# Altium PCB lab2_kuchenov_buck.PcbDoc
Units mm, origin at the board's own origin, x right, y up, seen from the top; angles counter-clockwise.
Board outline 41.2 x 41.6 mm, 2 copper layers (Top Layer, Bottom Layer), stack 1.57 mm thick; 27 components, 17 nets, 80 pads, 103 vias.
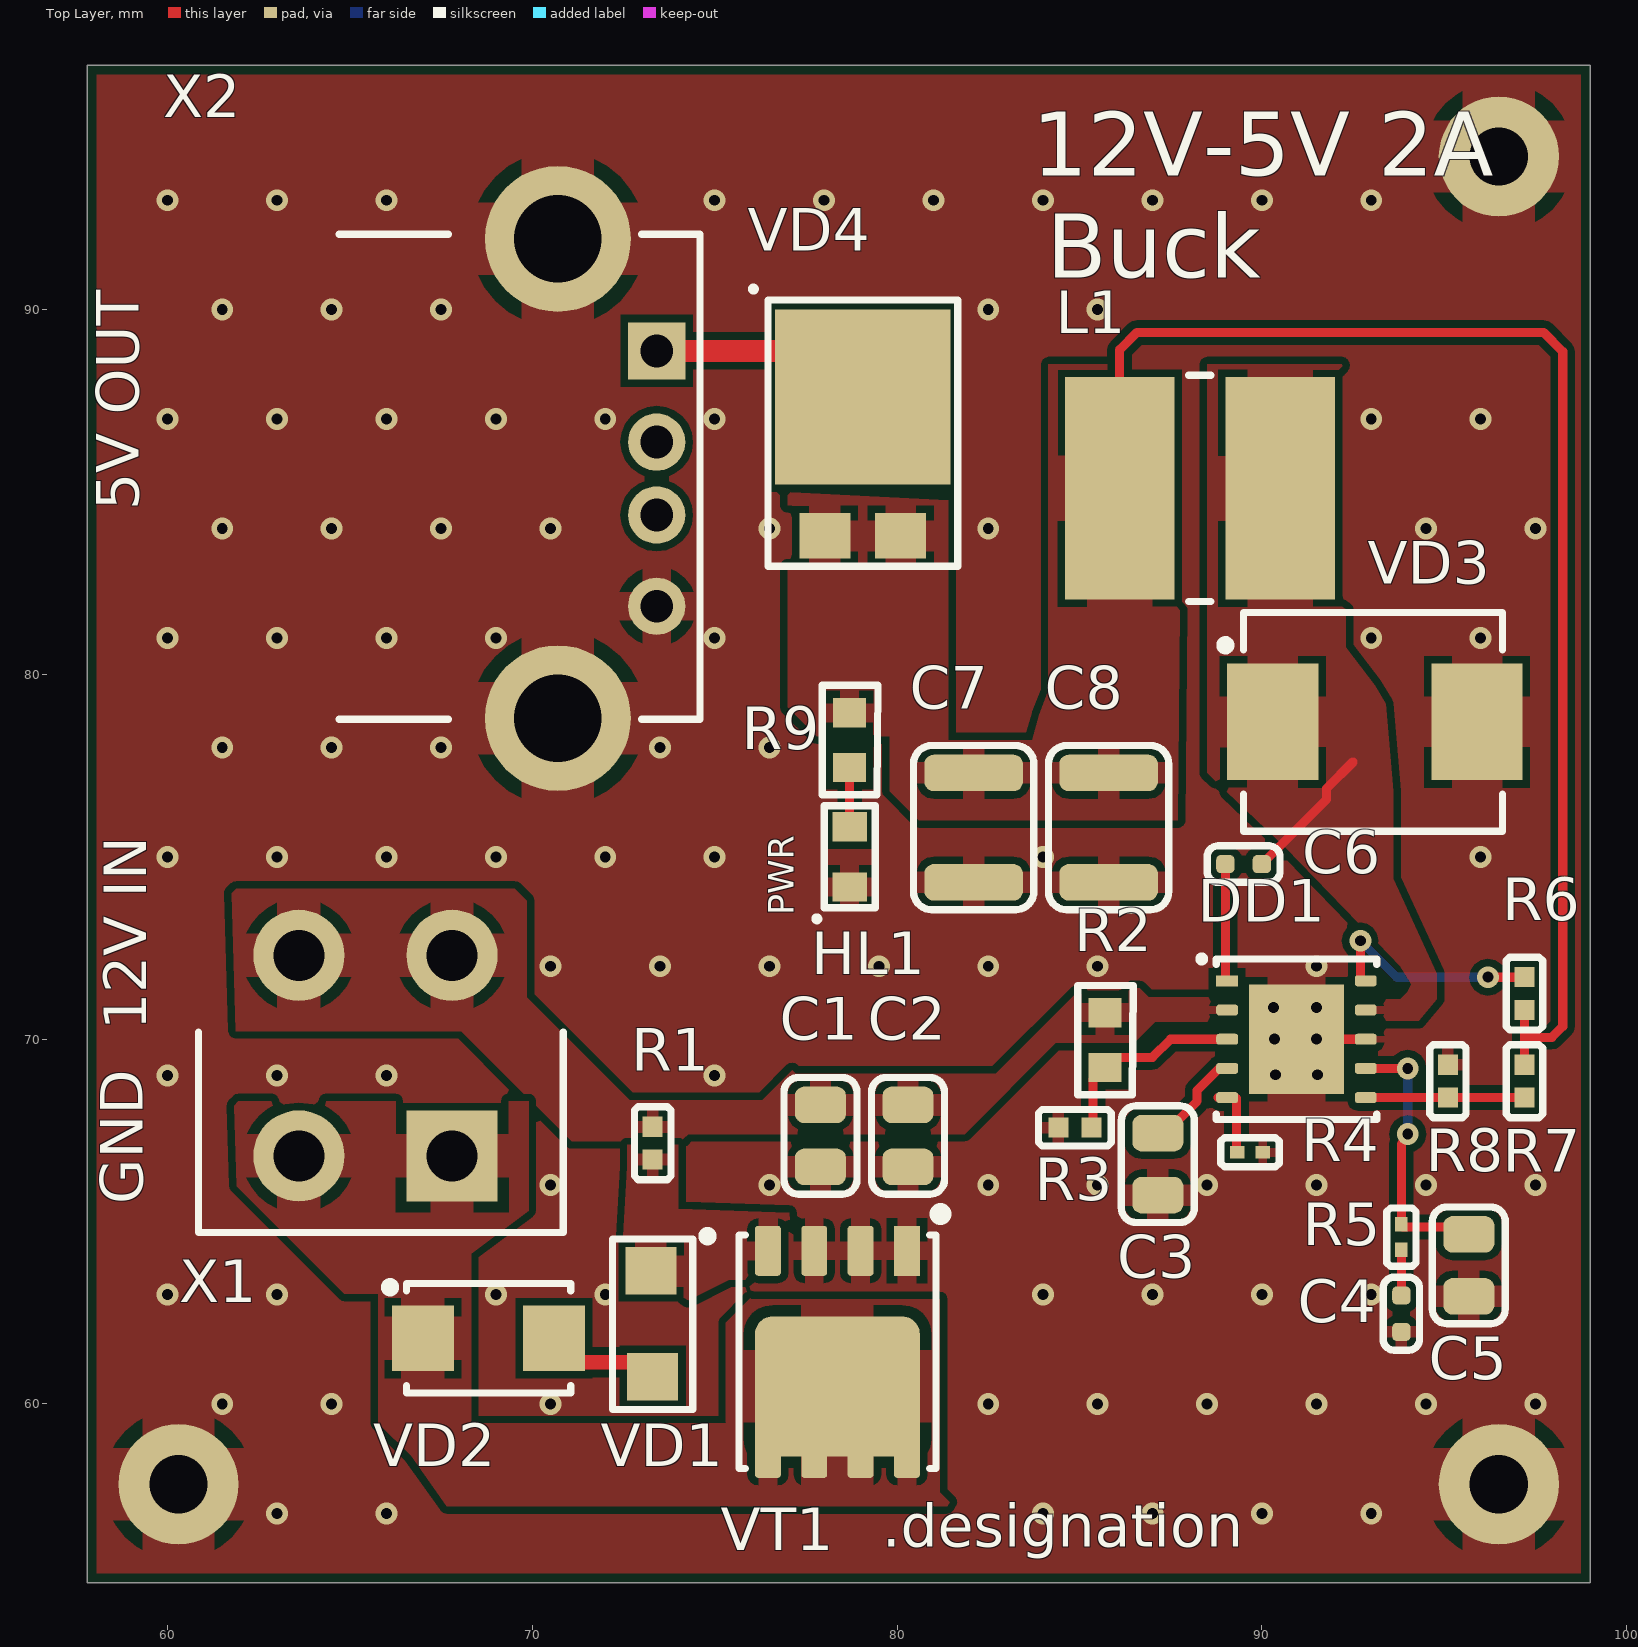
[diagram p0: Top Layer view]
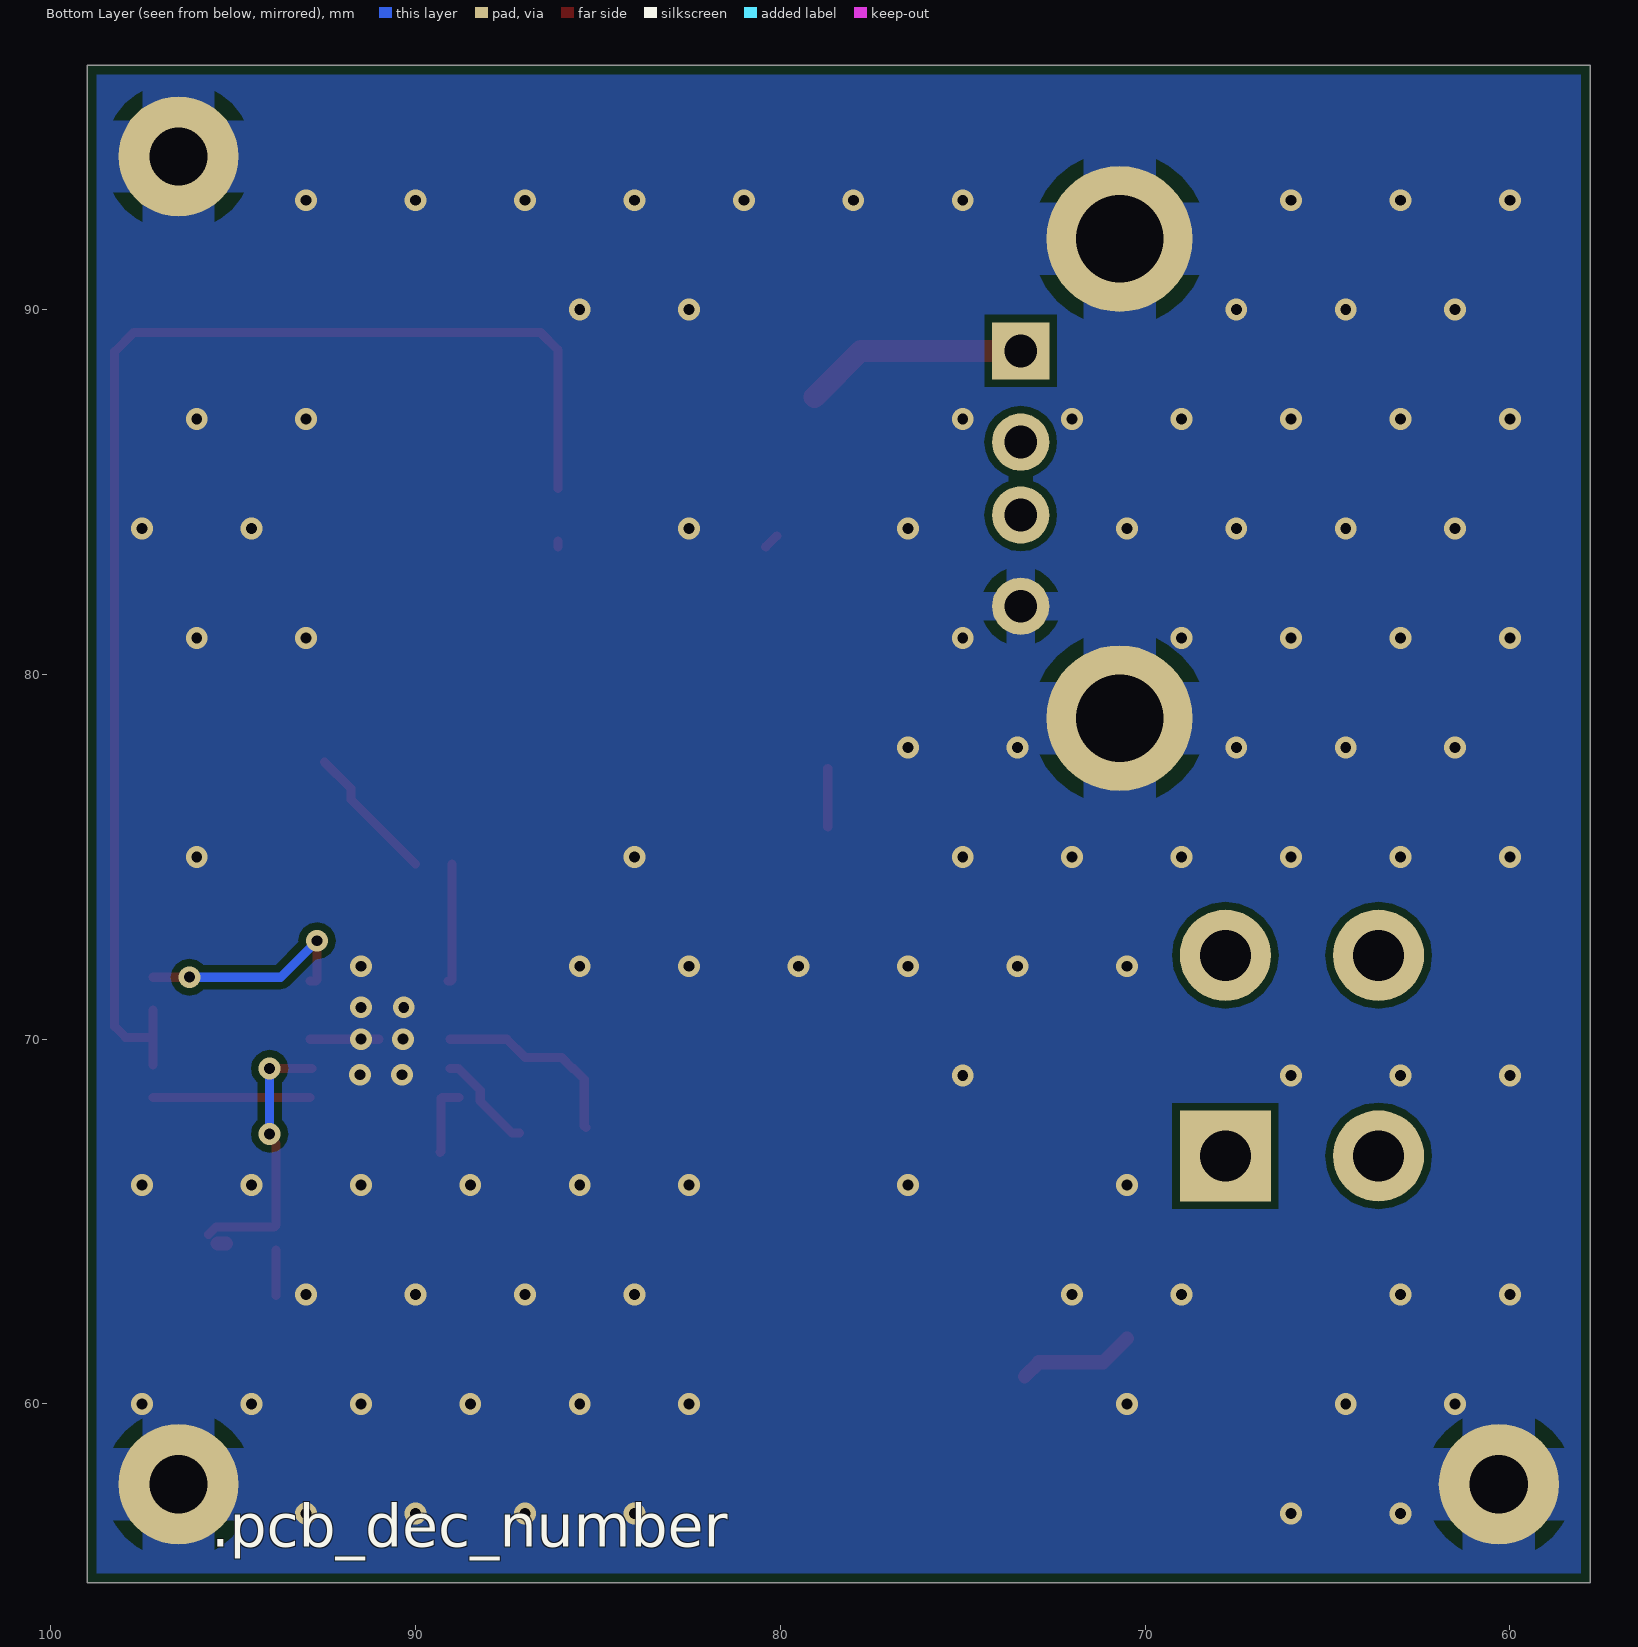
[diagram p1: Bottom Layer view, seen from below]
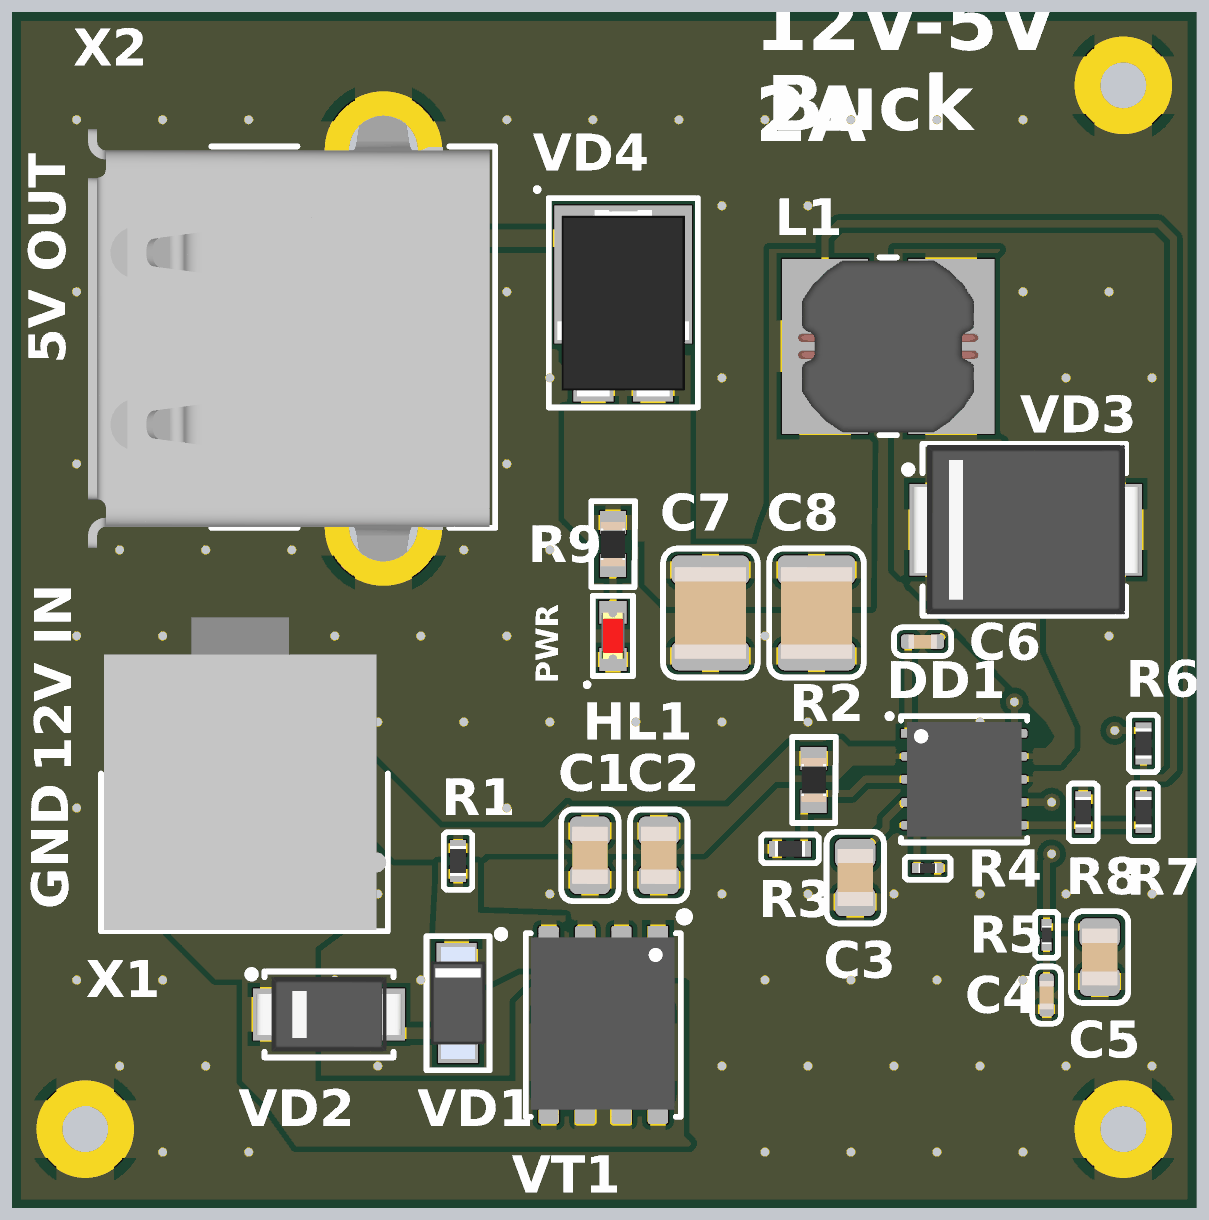
[diagram p2: 3D render of the assembled board from above, using the file's embedded part models]

## Layer stack, top to bottom
Top Solder: solder mask 0.0102, Solder Resist, Dk 3.5
Top Layer: signal copper 0.035
Core 1: core 1.5, FR4, Dk 4.6
Bottom Layer: signal copper 0.035
Bottom Solder: solder mask 0.0102, Solder Resist, Dk 3.5

## Board outline
57.8,55.1 57.8,96.7 99,96.7 99,55.1

## Design rules (kind name [scope] priority, off if disabled: settings)
AcuteAngle min_acute_angle [OnCopper] p1: minimum=3.50000000000000E+0001 checktracksonly=FALSE // Минимальный угол между примитивами топологии
BoardOutlineClearance board_outline_clearance_std [NOT (OnLayer('Bottom Overlay') OR OnLayer('Top Overlay'))] p1: gap=0.25 ignorepadtopadclearanceinfootprint=FALSE except(0: Arc-SplitContinuation Track-SplitContinuation SMDPad-SplitContinuation THPad-SplitContinuation Via-SplitContinuation Fill-SplitContinuation Poly-SplitContinuation Region-SplitContinuation Text-SplitContinuation) // Отступ элементов топологии от края фрезеруемой печатной платы
Clearance clearance_outer_35um_std [OnTopLayer OR OnBottomLayer] p1: gap=0.2 ignorepadtopadclearanceinfootprint=TRUE except(0.25: Arc-Hole Track-Hole SMDPad-Hole THPad-Hole Via-Hole Fill-Hole Poly-Hole Region-Hole Text-Hole) // Зазоры на внешних слоях
Clearance clearance_inner_35um_std [NOT (OnTopLayer Or OnBottomLayer)] p2: gap=0.2 ignorepadtopadclearanceinfootprint=FALSE except(0.25: Arc-Hole Track-Hole SMDPad-Hole THPad-Hole Via-Hole Fill-Hole Poly-Hole Region-Hole Text-Hole) // Зазоры на внутренних слоях
ComponentClearance [All] p1: gap=0 collisioncheckmode=3 verticalgap=0 showdistances=FALSE
DiffPairsRouting diff_pairs_routing [All] p1: maxlimit=0.127 minlimit=0.127 mostfreqgap=0.127 toplayer_minwidth=0.143 toplayer_maxwidth=0.143 toplayer_prefwidth=0.143 bottomlayer_minwidth=0.143 bottomlayer_maxwidth=0.143 bottomlayer_prefwidth=0.143 impedanceprofiledriven=TRUE impedanceprofileid={FD46899E-B5A2-4EF5-A302-5D2DB6A51F35} maxuncoupledlength=12.7 // Правила трассировки дифференциальных пар
HoleSize min_hole_size_std [IsPad] p1: absolutevalues=TRUE maxlimit=5.9 minlimit=0.6 maxpercent=80.000 minpercent=20.000 // Диаметр межслойного переходного отверстия
HoleSize min_hole_size_via_std [IsVia] p2: absolutevalues=TRUE maxlimit=5.9 minlimit=0.3 maxpercent=80.000 minpercent=20.000 // Минимальный диаметр монтажного отверстия
HoleToHoleClearance hole_to_hole_clearance_std [All] p1: gap=0.2 allowstackedmicrovias=FALSE // Минимальное расстояние между краями двух отверстий
MinimumAnnularRing min_via_ar_std [All] p1: minimumring=0.15 // Поясок площадки переходного отверстия (Annular ring VIA)
MinimumAnnularRing min_pad_ar_std [All] p2: minimumring=0.2 // Поясок монтажной контактной площадки (Annular ring PAD)
MinimumSolderMaskSliver min_solder_mask_bridge_std [All] p1: minsoldermaskwidth=0.15 // Мнимальная ширина масочного мостика
PlaneClearance plane_clearance_35um_std [All] p1: clearance=0.2 // Отступ полигона (для слоя plane) от элементов топологии
PlaneConnect [All] p1: planeconnectstyle=Relief reliefexpansion=0.5 reliefentries=4 reliefconductorwidth=0.2 reliefairgap=0.2
PolygonConnect poly_connect_to_pad<=0.3 [(AsMM(PadXSize_AllLayers)<=0.301) or (AsMM(PadYSize_AllLayers)<=0.301)] p1: thpad.connectstyle=Relief thpad.reliefconductorwidth=0.2 thpad.reliefentries=4 thpad.polygonreliefangle="90 Angle" thpad.airgapwidth=0.2 smdpad.connectstyle=Relief smdpad.reliefconductorwidth=0.2 smdpad.reliefentries=4 smdpad.polygonreliefangle="90 Angle" smdpad.airgapwidth=0.2 via.connectstyle=Direct via.reliefconductorwidth=0.254 via.reliefentries=4 via.polygonreliefangle="90 Angle" via.airgapwidth=0.254 // Правила подключения полигонов для падов от 0,3мм и меньше
PolygonConnect poly_connect_to_pad<=0.4 [(AsMM(PadXSize_AllLayers)<=0.401) or (AsMM(PadYSize_AllLayers)<=0.401)] p2: thpad.connectstyle=Relief thpad.reliefconductorwidth=0.26 thpad.reliefentries=4 thpad.polygonreliefangle="90 Angle" thpad.airgapwidth=0.2 smdpad.connectstyle=Relief smdpad.reliefconductorwidth=0.26 smdpad.reliefentries=4 smdpad.polygonreliefangle="90 Angle" smdpad.airgapwidth=0.2 via.connectstyle=Direct via.reliefconductorwidth=0.254 via.reliefentries=4 via.polygonreliefangle="90 Angle" via.airgapwidth=0.254 // Правила подключения полигонов для падов от 0,4 и меньше
PolygonConnect poly_connect_to_pad<=0.6 [(AsMM(PadXSize_AllLayers)<=0.601) or (AsMM(PadYSize_AllLayers)<=0.601)] p3: thpad.connectstyle=Relief thpad.reliefconductorwidth=0.33 thpad.reliefentries=4 thpad.polygonreliefangle="90 Angle" thpad.airgapwidth=0.2 smdpad.connectstyle=Relief smdpad.reliefconductorwidth=0.33 smdpad.reliefentries=4 smdpad.polygonreliefangle="90 Angle" smdpad.airgapwidth=0.2 via.connectstyle=Direct via.reliefconductorwidth=0.254 via.reliefentries=4 via.polygonreliefangle="90 Angle" via.airgapwidth=0.254 // Правила подключения полигонов для падов от 0,6мм и меньше
PolygonConnect poly_connect_to_pad<=0.7 [(AsMM(PadXSize_AllLayers)<=0.701) or (AsMM(PadYSize_AllLayers)<=0.701)] p4: thpad.connectstyle=Relief thpad.reliefconductorwidth=0.46 thpad.reliefentries=4 thpad.polygonreliefangle="90 Angle" thpad.airgapwidth=0.2 smdpad.connectstyle=Relief smdpad.reliefconductorwidth=0.46 smdpad.reliefentries=4 smdpad.polygonreliefangle="90 Angle" smdpad.airgapwidth=0.2 via.connectstyle=Direct via.reliefconductorwidth=0.254 via.reliefentries=4 via.polygonreliefangle="90 Angle" via.airgapwidth=0.254 // Правила подключения полигонов для падов от 0,7мм и меньше
PolygonConnect poly_connect_to_pad<=0.8 [(AsMM(PadXSize_AllLayers)<=0.8)or(AsMM(PadYSize_AllLayers)<=0.8)] p5: thpad.connectstyle=Relief thpad.reliefconductorwidth=0.53 thpad.reliefentries=4 thpad.polygonreliefangle="90 Angle" thpad.airgapwidth=0.3 smdpad.connectstyle=Relief smdpad.reliefconductorwidth=0.53 smdpad.reliefentries=4 smdpad.polygonreliefangle="90 Angle" smdpad.airgapwidth=0.2 via.connectstyle=Direct via.reliefconductorwidth=0.254 via.reliefentries=4 via.polygonreliefangle="90 Angle" via.airgapwidth=0.254 // Правила подключения полигонов для падов от 0,8мм и меньше
PolygonConnect poly_connect_to_pad<=1 [(AsMM(PadXSize_AllLayers)<=1.01)or(AsMM(PadYSize_AllLayers)<=1.01)] p6: thpad.connectstyle=Relief thpad.reliefconductorwidth=0.6 thpad.reliefentries=4 thpad.polygonreliefangle="90 Angle" thpad.airgapwidth=0.3 smdpad.connectstyle=Relief smdpad.reliefconductorwidth=0.6 smdpad.reliefentries=4 smdpad.polygonreliefangle="90 Angle" smdpad.airgapwidth=0.2 via.connectstyle=Direct via.reliefconductorwidth=0.254 via.reliefentries=4 via.polygonreliefangle="90 Angle" via.airgapwidth=0.254 // Правила подключения полигонов для падов от 1мм и меньше
PolygonConnect poly_connect_to_pad<=1.3 [(AsMM(PadXSize_AllLayers)<=1.31)or(AsMM(PadYSize_AllLayers)<=1.31)] p7: thpad.connectstyle=Relief thpad.reliefconductorwidth=0.66 thpad.reliefentries=4 thpad.polygonreliefangle="90 Angle" thpad.airgapwidth=0.3 smdpad.connectstyle=Relief smdpad.reliefconductorwidth=0.86 smdpad.reliefentries=4 smdpad.polygonreliefangle="90 Angle" smdpad.airgapwidth=0.2 via.connectstyle=Direct via.reliefconductorwidth=0.254 via.reliefentries=4 via.polygonreliefangle="90 Angle" via.airgapwidth=0.254 // Правила подключения полигонов для падов от 1,3мм и меньше
PolygonConnect poly_connect_to_pad<=1.6 [(AsMM(PadXSize_AllLayers)<=1.61)or(AsMM(PadYSize_AllLayers)<=1.61)] p8: thpad.connectstyle=Relief thpad.reliefconductorwidth=0.8 thpad.reliefentries=4 thpad.polygonreliefangle="90 Angle" thpad.airgapwidth=0.3 smdpad.connectstyle=Relief smdpad.reliefconductorwidth=1 smdpad.reliefentries=4 smdpad.polygonreliefangle="90 Angle" smdpad.airgapwidth=0.2 via.connectstyle=Direct via.reliefconductorwidth=0.254 via.reliefentries=4 via.polygonreliefangle="90 Angle" via.airgapwidth=0.254 // Правила подключения полигонов для падов от 1,6мм и меньше
PolygonConnect poly_connect_to_pad<=1.8 [(AsMM(PadXSize_AllLayers)<=1.8)or(AsMM(PadYSize_AllLayers)<=1.8)] p9: thpad.connectstyle=Relief thpad.reliefconductorwidth=1 thpad.reliefentries=4 thpad.polygonreliefangle="90 Angle" thpad.airgapwidth=0.3 smdpad.connectstyle=Relief smdpad.reliefconductorwidth=1.2 smdpad.reliefentries=4 smdpad.polygonreliefangle="90 Angle" smdpad.airgapwidth=0.2 via.connectstyle=Direct via.reliefconductorwidth=0.254 via.reliefentries=4 via.polygonreliefangle="90 Angle" via.airgapwidth=0.254 // Правила подключения полигонов для падов от 1,8мм и меньше
PolygonConnect poly_connect_to_pad<=2 [(AsMM(PadXSize_AllLayers)<=2.01)or(AsMM(PadYSize_AllLayers)<=2.01)] p10: thpad.connectstyle=Relief thpad.reliefconductorwidth=1.1 thpad.reliefentries=4 thpad.polygonreliefangle="90 Angle" thpad.airgapwidth=0.3 smdpad.connectstyle=Relief smdpad.reliefconductorwidth=1.4 smdpad.reliefentries=4 smdpad.polygonreliefangle="90 Angle" smdpad.airgapwidth=0.2 via.connectstyle=Direct via.reliefconductorwidth=0.254 via.reliefentries=4 via.polygonreliefangle="90 Angle" via.airgapwidth=0.254 // Правила подключения полигонов для падов от 2мм и меньше
PolygonConnect poly_connect_to_pad<=2.3 [(AsMM(PadXSize_AllLayers)<=2.31)or(AsMM(PadYSize_AllLayers)<=2.31)] p11: thpad.connectstyle=Relief thpad.reliefconductorwidth=1.2 thpad.reliefentries=4 thpad.polygonreliefangle="90 Angle" thpad.airgapwidth=0.3 smdpad.connectstyle=Relief smdpad.reliefconductorwidth=1.4 smdpad.reliefentries=4 smdpad.polygonreliefangle="90 Angle" smdpad.airgapwidth=0.2 via.connectstyle=Direct via.reliefconductorwidth=0.254 via.reliefentries=4 via.polygonreliefangle="90 Angle" via.airgapwidth=0.254 // Правила подключения полигонов для падов от 2,3мм и меньше
PolygonConnect poly_connect_to_pad<=2.5 [(AsMM(PadXSize_AllLayers)<=2.51)or(AsMM(PadYSize_AllLayers)<=2.51)] p12: thpad.connectstyle=Relief thpad.reliefconductorwidth=1.2 thpad.reliefentries=4 thpad.polygonreliefangle="90 Angle" thpad.airgapwidth=0.3 smdpad.connectstyle=Relief smdpad.reliefconductorwidth=1.4 smdpad.reliefentries=4 smdpad.polygonreliefangle="90 Angle" smdpad.airgapwidth=0.2 via.connectstyle=Direct via.reliefconductorwidth=0.254 via.reliefentries=4 via.polygonreliefangle="90 Angle" via.airgapwidth=0.254 // Правила подключения полигонов для падов от 2,5мм и меньше
PolygonConnect poly_connect_to_pad<=2.7 [(AsMM(PadXSize_AllLayers)<=2.71)or(AsMM(PadYSize_AllLayers)<=2.71)] p13: thpad.connectstyle=Relief thpad.reliefconductorwidth=1.4 thpad.reliefentries=4 thpad.polygonreliefangle="90 Angle" thpad.airgapwidth=0.3 smdpad.connectstyle=Relief smdpad.reliefconductorwidth=1.6 smdpad.reliefentries=4 smdpad.polygonreliefangle="90 Angle" smdpad.airgapwidth=0.2 via.connectstyle=Direct via.reliefconductorwidth=0.254 via.reliefentries=4 via.polygonreliefangle="90 Angle" via.airgapwidth=0.254 // Правила подключения полигонов для падов от 2,7мм и меньше
PolygonConnect poly_connect_to_pad<=3 [(AsMM(PadXSize_AllLayers)<=3.01)or(AsMM(PadYSize_AllLayers)<=3.01)] p14: thpad.connectstyle=Relief thpad.reliefconductorwidth=1.6 thpad.reliefentries=4 thpad.polygonreliefangle="90 Angle" thpad.airgapwidth=0.3 smdpad.connectstyle=Relief smdpad.reliefconductorwidth=1.8 smdpad.reliefentries=4 smdpad.polygonreliefangle="90 Angle" smdpad.airgapwidth=0.2 via.connectstyle=Direct via.reliefconductorwidth=0.254 via.reliefentries=4 via.polygonreliefangle="90 Angle" via.airgapwidth=0.254 // Правила подключения полигонов для падов от 3мм и меньше
PolygonConnect poly_connect_to_pad<=7 [(AsMM(PadXSize_AllLayers)<7.01)or(AsMM(PadYSize_AllLayers)<=7.01)] p15: thpad.connectstyle=Relief thpad.reliefconductorwidth=2 thpad.reliefentries=4 thpad.polygonreliefangle="90 Angle" thpad.airgapwidth=0.4 smdpad.connectstyle=Relief smdpad.reliefconductorwidth=2 smdpad.reliefentries=4 smdpad.polygonreliefangle="90 Angle" smdpad.airgapwidth=0.3 via.connectstyle=Direct via.reliefconductorwidth=0.254 via.reliefentries=4 via.polygonreliefangle="90 Angle" via.airgapwidth=0.254 // Правила подключения полигонов для падов от 7мм и меньше
PolygonConnect poly_connect_to_pad [All] p16: thpad.connectstyle=Relief thpad.reliefconductorwidth=0.25 thpad.reliefentries=4 thpad.polygonreliefangle="90 Angle" thpad.airgapwidth=0.2 smdpad.connectstyle=Relief smdpad.reliefconductorwidth=0.25 smdpad.reliefentries=4 smdpad.polygonreliefangle="90 Angle" smdpad.airgapwidth=0.2 via.connectstyle=Direct via.reliefconductorwidth=0.25 via.reliefentries=4 via.polygonreliefangle="90 Angle" via.airgapwidth=0.2 // Правила подключения полигонов общие
RoutingCorners [All] p1 off: cornerstyle=45-Degree minsetback=2.5 maxsetback=2.5
RoutingVias [All] p1: holewidth=0.3 width=0.6 viastyle="Through Hole" minholewidth=0.3 minwidth=0.6 maxholewidth=5.9 maxwidth=6.4
SilkToSilkClearance silk_to_silk_clearance_std [All] p1 off: silktosilkclearance=0.15 // Отступ текста шелкографии от других примитивов шелкографии
SilkToSolderMaskClearance silk_to_solder_mask_clearance_std [IsPad] p1 off: minsilkscreentomaskgap=0.15 clearancetoexposedcopper=FALSE // Минимальное расстояние между элементами шелкографии и вскрытой медью
SolderMaskExpansion solder_mask_expansion_std [All] p1: expansion=0.05 // Припуск паяльной масски
UnRoutedNet [All] p1: checkbadconnections=TRUE
Width width_35um_std [All] p1: maxlimit=10 minlimit=0.2 preferedwidth=0.2 checkconnectedcopper=TRUE // Ширина проводников (общая)
19 further rules are at their usual default settings.

## Components (designator, comment, footprint, x,y, rotation, side; value= is the part's Value field where it differs from the comment)
C1 "10 мк" C0805 77.9,67.35 r90 top
C2 "10 мк" C0805 80.3,67.35 r270 top
C3 "2700 п" C0805 87.15,66.575 r270 top
C4 "1000 п" C0402 93.825,62.475 r270 top
C5 "18 п" C0805 95.675,63.8 r270 top
C6 "0,1 мк" C0402 89.5,74.8 r180 top
C7 "47 мк" C1210 82.1,75.8 r270 top
C8 "47 мк" C1210 85.8,75.8 r270 top
DD1 "TPS54561QDPRTQ1" WSON-10-400X400X80 90.95,70 r0 top
HL1 "TLMS1000-GS08" HL0603 78.7,75 r90 top
L1 "SRN6045-6R8Y" SRN-2-600X600X450 88.3,85.1 r180 top
R1 "20" R0402 73.3,67.15 r90 top
R2 "147 к" R0603 85.7,69.975 r90 top
R3 "18,7 к" R0402 84.875,67.575 r0 top
R4 "86,6 к" R0201 89.675,66.9 r180 top
R5 "23,7 к" R0201 93.825,64.575 r90 top
R6 "1 к" R0402 97.2,71.25 r270 top
R7 "60,4 к" R0402 97.2,68.85 r90 top
R8 "11,5 к" R0402 95.1,68.85 r270 top
R9 "220" R0603 78.7,78.2 r90 top
VD1 "BZD17C15P" DO-219AB 73.3,62.2 r270 top
VD2 "SL13-E3/5AT" DO-214AC 68.8,61.8 r0 top
VD3 "SS36-E3/57T" DO-214AB 93.1,78.7 r0 top
VD4 "SS3P4L-M3/87A" TO-277A 79.06,86.565 r90 top
VT1 "CSD19532Q5B" SON-8 78.365,61.43 r180 top
X1 "4-1775099-0" 4-1775099-0 65.85,70.2 r180 top
X2 "292303-5" 292303-5 67.4,85.37 r270 top

## Footprints (in the part's own frame and the unit in brackets; to place one, negate y for a bottom-side part, rotate by r counter-clockwise, add the part's x,y. Pads: shape width x height; smd on the part's side, far side on the other; paste and mask are expansions set on the pad)
4-1775099-0 [mm]
  rect 2.5x2.5 hole 1.4: 1(-1.95,3.4)
  round 2.5 hole 1.4: 2(2.25,3.4) 3(-1.95,-2.1) 4(2.25,-2.1)
  silkscreen extent -5,0 5,5.5, body extent -4.95,-5.45 4.9,5.45, height 12.8
292303-5 [mm]
  rect 1.57x1.57 hole 0.9: 1(-3.5,6.01)
  round 1.57 hole 0.9: 2(-1,6.01) 3(1,6.01) 4(3.5,6.01)
  round 4 hole 2.4: TP1(-6.57,3.3) TP1(6.57,3.3)
  silkscreen extent -6.7,-2.7 6.6,7.2, body extent -8.12,-7 8.12,7, height 7.77
C0402 [mm] "Chip Capacitor, 2-Leads, Body 1,00x0,50mm, IPC Medium Density"
  rrect50% 0.5x0.5 smd: 1(-0.5,0) 2(0.5,0)
  silkscreen extent -1,-0.5 1,0.5, body extent -0.5,-0.25 0.5,0.25, height 0.5
C0805 [mm] "Chip Capasitor, 2-Leads, Body 2,00x1,25mm, IPC Medium Density"
  rrect50% 1x1.4 smd: 1(-0.85,0) 2(0.85,0)
  silkscreen extent -1.6,-1 1.6,1, body extent -1,-0.62 1,0.63, height 0.6
C1210 [mm] "Chip Capacitor, 2-Leads, Body 3,20x2,50mm, IPC Medium Density"
  rrect50% 1x2.7 smd: 1(-1.5,0) 2(1.5,0)
  silkscreen extent -2.25,-1.65 2.25,1.65, body extent -1.6,-1.25 1.6,1.25, height 0.78
DO-214AB [mm] "Molded Diode, 2-Leads, Body 7,94x5,91mm, IPC Medium Density"
  rect 2.5x3.2 smd: 1(-2.8,0) 2(2.8,0)
  silkscreen extent -4.22,-3 3.5,3, body extent -3.95,-2.95 3.95,2.95, height 2.59
DO-214AC [mm] "Molded Diode, 2-Leads, Body 4,25x2,67mm, IPC Medium Density"
  rect 1.7x1.8 smd: 1(-1.8,0) 2(1.8,0)
  silkscreen extent -2.82,-1.5 2.25,1.52, body extent -2.55,-1.3 2.55,1.3, height 2.26
DO-219AB [mm]
  rect 1.3x1.4 smd: 1(-1.45,-0.05) 2(1.45,0)
  silkscreen extent -2.45,-1.1 2.35,1.55, body extent -1.95,-0.95 1.95,0.95, height 1.25
HL0603 [mm] "Chip Diode, 2-Leads, Body 1,60x0,80mm, IPC Medium Density"
  rect 0.8x0.95 smd: 1(-0.825,0) 2(0.825,0)
  silkscreen extent -1.75,-0.7 1.4,0.95, body extent -0.81,-0.4 0.81,0.4, height 0.6
R0201 [mm] "Chip Resistor, 2-Leads, Body 0,60x0,30mm, IPC Medium Density"
  rect 0.4x0.35 smd: 1(-0.35,0) 2(0.35,0)
  silkscreen extent -0.8,-0.4 0.8,0.4, body extent -0.32,-0.17 0.32,0.17, height 0.26
R0402 [mm] "Chip Resistor, 2-Leads, Body 1,00x0,50mm, IPC Medium Density"
  rect 0.55x0.55 smd: 1(-0.45,0) 2(0.45,0)
  silkscreen extent -1,-0.5 1,0.5, body extent -0.53,-0.28 0.53,0.28, height 0.4
R0603 [mm] "Chip Resistor, 2-Leads, Body 1,60x0,80mm, IPC Medium Density"
  rect 0.8x0.9 smd: 1(-0.75,0) 2(0.75,0)
  silkscreen extent -1.5,-0.77 1.5,0.75, body extent -0.77,-0.43 0.78,0.43, height 0.43
SON-8 [mm]
  rrect25% 0.71x1.372 smd paste-10: D(-1.905,2.77) D(-0.635,2.77) D(0.635,2.77) D(1.905,2.77)
  rrect25% 4.52x3.85 smd paste-10: D(0,0.95)
  rrect25% 0.71x1.372 smd paste-0.002: G(1.905,-2.77) S(-0.635,-2.77) S(0.635,-2.77)
  rect 0.71x1.372 smd paste-0.002: S(-1.905,-2.77)
  silkscreen extent -2.83,-3.78 2.7,3.2, body extent -2.48,-3.05 2.52,2.95, height 1.05
SRN-2-600X600X450 [mm] "Precision Wire Wound Inductor, 2-Leads, Body 6,00x6,00mm, IPC Medium Density"
  rect 3x6.1 smd: 1(-2.2,0) 2(2.2,0)
  silkscreen extent -0.3,-3.1 0.3,3.1, body extent -3.15,-3 3.15,3, height 4.5
TO-277A [mm] "DFN, 3-Leads, Body 4,30x6,10mm, Pitch 3,81mm, IPC Medium Density"
  rect 4.8x4.8 smd: 1(1.04,0)
  rect 1.25x1.4 smd: 2(-2.765,-1.04) 2(-2.765,1.04)
  silkscreen extent -3.6,-2.6 4.05,3.05, body extent -3.21,-2.3 3.29,2.3, height 1.05
WSON-10-400X400X80 [mm] "SON, 10-Leads, Body 4,00x4,00mm, Pitch 0,80mm, Thermal Pad 3,00x2,6mm, IPC Medium Density"
  rect 2.6x3 smd paste-1.245: 0(0,0)
  rect 0.6x0.3 smd: 1(-1.9,1.6)
  rrect50% 0.6x0.3 smd: 2(-1.9,0.8) 3(-1.9,0) 4(-1.9,-0.8) 5(-1.9,-1.6) 6(1.9,-1.6) 7(1.9,-0.8) 8(1.9,0) 9(1.9,0.8) 10(1.9,1.6)
  silkscreen extent -2.65,-2.2 2.2,2.25, body extent -2,-2 2,2, height 0.8

## Part data
C1 C2: library part c0119, "=Описание", HelpURL=https://search.murata.co.jp/Ceramy/image/img/A01X/G101/ENG/GRM21BR61E106MA73-01.pdf, ID=c0119, Корпус=0805, Наименование=GRM21BR61E106MA73L, Напряжение="25 В", Номинал="10 мк", Номинальное напряжение="25 В", Описание="Конденсатор чип 0805 10 мкФ 25 В ±20 %", Отклонение="±20 %", Производитель="Murata Manufacturing Co., Ltd.", Рабочие температуры="от –55 °С до +85 °С", Температурный коэффициент емкости=X5R, Фамилия=Кученов
C3: library part c0120, "=Описание", HelpURL=https://product.tdk.com/en/search/capacitor/ceramic/mlcc/info?part_no=C2012C0G1H272J060AA, ID=c0120, Корпус=0805, Наименование=C2012C0G1H272J060AA, Напряжение="50 В", Номинал="2700 п", Номинальное напряжение="50 В", Описание="Конденсатор чип 0805 2,7 нФ 50 В ±5 %", Отклонение="±5 %", Производитель="TDK Corporation", Рабочие температуры="от –55 °С до +125 °С", Температурный коэффициент емкости=C0G, Фамилия=Кученов
C4: library part c0121, "=Описание", HelpURL=https://www.murata.com/en-eu/products/productdetail?partno=GRM1555C1H102JA01%23, ID=c0121, Корпус=0402, Наименование=GRM1555C1H102JA01J, Напряжение="50 В", Номинал="1000 п", Номинальное напряжение="50 В", Описание="Конденсатор чип 0402 1 нФ 50 В ±5 %", Отклонение="±5 %", Производитель="Murata Manufacturing Co., Ltd.", Рабочие температуры="от –55 °С до +125 °С", Температурный коэффициент емкости=C0G, Фамилия=Кученов
C5: library part c0122, "=Описание", HelpURL=https://datasheet.lcsc.com/szlcsc/1810191212_Samsung-Electro-Mechanics-CL21C180JBANNNC_C170109.pdf, ID=c0122, Корпус=0805, Наименование=CL21C180JBANNNC, Напряжение="50 В", Номинал="18 п", Номинальное напряжение="50 В", Описание="Конденсатор чип 0805 18 пФ 50 В ±5 %", Отклонение="±5 %", Производитель="Samsung electro-mechanics", Рабочие температуры="от –55 °С до +125 °С", Температурный коэффициент емкости=C0G, Фамилия=Кученов
C6: library part c0123, "=Описание", HelpURL=https://www.murata.com/products/productdetail?partno=GRM155R71A104KA01%23, ID=c0123, Корпус=0402, Наименование=GRM155R71A104KA01D, Напряжение="10 В", Номинал="0,1 мк", Номинальное напряжение="10 В", Описание="Конденсатор чип 0402 100 нФ 10 В ±15 %", Отклонение="±15 %", Производитель="Murata Manufacturing Co., Ltd.", Рабочие температуры="от –55 °С до +125 °С", Температурный коэффициент емкости=X7R, Фамилия=Кученов
C7 C8: library part c0124, "=Описание", HelpURL=https://www.murata.com/en-global/products/productdetail?partno=GRM32ER71A476KE15%23, ID=c0124, Корпус=1210, Наименование=GRM32ER71A476KE15, Напряжение="10 В", Номинал="47 мк", Номинальное напряжение="10 В", Описание="Конденсатор чип 1210 47 мкФ 10 В ±15 %", Отклонение="±15 %", Производитель="Murata Manufacturing Co., Ltd.", Рабочие температуры="от –55 °С до +125 °С", Температурный коэффициент емкости=X7R, Фамилия=Кученов
DD1: library part dd0015, "=Описание", HelpURL=https://www.ti.com/product/TPS54561-Q1, ID=dd0015, Входное напряжение="от 4,5 В до 60 В", Выходное напряжение="от 0,8 В до 59 В", Коммутируемый ток="до 5 А", Корпус=WSON-10, Наименование=TPS54561QDPRTQ1, Описание="Понижающий преобразователь напряжения 60 В и 5 А", Производитель="Texas Instruments", Рабочие температуры="от –40 °С до +125 °С", Фамилия=Кученов, Частота переключения="от 100 кГц до 2,5 МГц"
HL1: library part hl0001, "=Описание", HelpURL=https://www.vishay.com/leds/list/product-83172/, ID=hl0001, Корпус=0603, Наименование=TLMS1000-GS08, Номинальная длина волны="628 нм", Номинальная сила света="4 мкд", Номинальное падение напряжения="1,8 В", Номинальный прямой ток="15 мА", Описание="Светодиод чип 0603 красный", Производитель="Vishay Intertechnology, Inc.", Рабочие температуры="от –40 °С до +100 °С", Рассеиваемая мощность="40 мВт", Фамилия=Ларионов, Цвет=Red
L1: library part l0006, "=Описание", HelpURL=https://www.bourns.com/products/magnetic-products/power-inductors-smd-semi-shielded/product/SRN6045, ID=l0006, Индуктивность="6,8 мкГн", Корпус="6,0 x 6,0 x 4,5", Максимальное активное сопротивление="47,3 мОм", Наименование=SRN6045-6R8Y, Номинал="6,8 мкГн", Номинальное активное сопротивление="47,3 мОм", Номинальный ток (при нагреве на 20 °С/40 °С)="2,8 А", Описание="Катушка индуктивности 6,8 мкГн ±30 %", Отклонение="±30 %", Производитель="Bourns, Inc.", Рабочее напряжение="не указано", Рабочие температуры="от –40 °С до +125 °С", Резонансная частота="20 МГц", Ток насыщения="3,8 А", Фамилия=Кученов
R1: library part r0135, "=Описание", HelpURL=https://www.yageo.com/upload/media/product/productsearch/datasheet/rchip/PYu-RC_Group_51_RoHS_L_11.pdf, ID=r0135, Корпус=0402, Наименование=RC0402FR-0718K7L, Номинал=20, Номинальное напряжение="50 В", Номинальный ток="1 А", Описание="Резистор чип 0402 20 Ом ±1 % 0,0625 Вт", Отклонение="±1 %", Производитель="YAGEO Corp.", Рабочие температуры="от –55 °С до +155 °С", Фамилия=Кученов
R2: library part r0100, "=Описание", HelpURL=https://www.yageo.com/upload/media/product/productsearch/datasheet/rchip/PYu-RC_Group_51_RoHS_L_11.pdf, ID=r0100, Корпус=0603, Наименование=RC0603FR-07147KL, Номинал="147 к", Номинальное напряжение="75 В", Номинальный ток="1 А", Описание="Резистор чип 0603 147 кОм ±1 % 0,1 Вт", Отклонение="±1 %", Производитель="YAGEO Corp.", Рабочие температуры="от –55 °С до +155 °С", Фамилия=Жернаков
R3: library part r0134, "=Описание", HelpURL=https://www.yageo.com/upload/media/product/productsearch/datasheet/rchip/PYu-RC_Group_51_RoHS_L_11.pdf, ID=r0134, Корпус=0402, Наименование=RC0402FR-0718K7L, Номинал="18,7 к", Номинальное напряжение="50 В", Номинальный ток="1 А", Описание="Резистор чип 0402 18,7 кОм ±1 % 0,0625 Вт", Отклонение="±1 %", Производитель="YAGEO Corp.", Рабочие температуры="от –55 °С до +155 °С", Фамилия=Кученов
R4: library part r0129, "=Описание", HelpURL=https://www.yageo.com/upload/media/product/productsearch/datasheet/rchip/PYu-RC_Group_51_RoHS_L_11.pdf, ID=r0129, Корпус=0201, Наименование=RC0201FR-0786K6L, Номинал="86,6 к", Номинальное напряжение="25 В", Номинальный ток="0.5 А", Описание="Резистор чип 0201 86,6 кОм ±1 % 0,05 Вт", Отклонение="±1 %", Производитель="YAGEO Corp.", Рабочие температуры="от –55 °С до +125 °С", Фамилия=Кученов
R5: library part r0131, "=Описание", HelpURL=https://www.yageo.com/upload/media/product/productsearch/datasheet/rchip/PYu-RC_Group_51_RoHS_L_11.pdf, ID=r0131, Корпус=0201, Наименование=RC0201FR-0723K7L, Номинал="23,7 к", Номинальное напряжение="25 В", Номинальный ток="0.5 А", Описание="Резистор чип 0201 23,7 кОм ±1 % 0,05 Вт", Отклонение="±1 %", Производитель="YAGEO Corp.", Рабочие температуры="от –55 °С до +125 °С", Фамилия=Кученов
R6: library part r0130, "=Описание", HelpURL=https://www.vishay.com/docs/20035/dcrcwe3.pdf, ID=r0130, Корпус=0402, Наименование=CRCW04021K00FKED, Номинал="1 к", Номинальное напряжение="50 В", Номинальный ток="1.5 А", Описание="Резистор чип 0402 1 кОм ±1 % 0,063 Вт", Отклонение="±1 %", Производитель="Vishay Intertechnology, Inc.", Рабочие температуры="от –55 °С до +155 °С", Фамилия=Кученов
R7: library part r0132, "=Описание", HelpURL=https://www.vishay.com/docs/20035/dcrcwe3.pdf, ID=r0132, Корпус=0402, Наименование=CRCW040260K4FKED, Номинал="60,4 к", Номинальное напряжение="50 В", Номинальный ток="1.5 А", Описание="Резистор чип 0402 60,4 кОм ±1 % 0,063 Вт", Отклонение="±1 %", Производитель="Vishay Intertechnology, Inc.", Рабочие температуры="от –55 °С до +155 °С", Фамилия=Кученов
R8: library part r0133, "=Описание", HelpURL=https://www.vishay.com/docs/20035/dcrcwe3.pdf, ID=r0133, Корпус=0402, Наименование=CRCW040211K5FKED, Номинал="11,5 к", Номинальное напряжение="50 В", Номинальный ток="1.5 А", Описание="Резистор чип 0402 11,5 кОм ±1 % 0,063 Вт", Отклонение="±1 %", Производитель="Vishay Intertechnology, Inc.", Рабочие температуры="от –55 °С до +155 °С", Фамилия=Кученов
R9: library part r0009, "=Описание", HelpURL=https://www.yageo.com/upload/media/product/productsearch/datasheet/rchip/PYu-RC_Group_51_RoHS_L_11.pdf, ID=r0009, Корпус=0603, Наименование=RC0603FR-07220RL, Номинал=220, Номинальное напряжение="75 В", Номинальный ток="1 А", Описание="Резистор чип 0603 220 Ом ±1 % 0,1 Вт", Отклонение="±1 %", Производитель="YAGEO Corp.", Рабочие температуры="от -55 °С до +155 °С", Фамилия=Ларионов
VD1: library part vd0016, "=Описание", HelpURL=https://www.vishay.com/product?docid=85161, ID=vd0016, Корпус=DO-219AB, Наименование=BZD17C15P, Номинальное напряжение стабилизации="15 В", Номинальный ток стабилизации="50 мА", Описание="Стабилитрон 15 В", Производитель="Vishay Intertechnology, Inc.", Рабочие температуры="от –55 °С до +150 °С", Разброс напряжения стабилизации="13,8...15,6 В", Фамилия=Жернаков
VD2: library part vd0002, "=Описание", HelpURL=https://www.vishay.com/product?docid=88740, ID=vd0002, Импульсное обратное напряжение="30 В", Корпус=DO-214AC, Макс допустимый средний прямой ток="1,5 А", Наименование=SL13-E3/5AT, Описание="Диод Шоттки 30 В 1,5 А", Пиковое прямое напряжение="0,445 В", Производитель="Vishay Intertechnology, Inc.", Рабочие температуры="от –55 °С до +125 °С", Фамилия=Ларионов
VD3: library part vd0004, "=Описание", HelpURL=https://www.vishay.com/product?docid=88751, ID=vd0004, Импульсное обратное напряжение="60 В", Корпус=DO-214AB, Макс допустимый средний прямой ток="3 А", Наименование=SS36-E3/57T, Описание="Диод Шоттки 60 В 3 А", Пиковое прямое напряжение="0,75 В", Производитель="Vishay Intertechnology, Inc.", Рабочие температуры="от –55 °С до +150 °С", Фамилия=Жернаков
VD4: library part vd0003, "=Описание", HelpURL=https://www.vishay.com/diodes/list/product-88986/, ID=vd0003, Импульсное обратное напряжение="40 В", Корпус=TO-277A, Макс допустимый средний прямой ток="3 А", Наименование=SS3P4L-M3/87A, Описание="Диод Шоттки 40 В 3 А", Пиковое прямое напряжение="0,47 В", Производитель="Vishay Intertechnology, Inc.", Рабочие температуры="от –55 °С до +150 °С", Фамилия=Ларионов
VT1: library part vt0001, "=Описание", HelpURL=https://www.ti.com/product/CSD19532Q5B, ID=vt0001, Корпус=SON-8, Наименование=CSD19532Q5B, Напряжение затвор — исток="±20 В", Напряжение сток — исток="100 В", Описание="Транзистор полевой N-канальный 100 В 17 А", Производитель="Texas Instruments", Рабочие температуры="от –55 °С до +150 °С", Сопротивление сток — исток="0,0057 Ом", Ток стока="17 А", Фамилия=Жернаков
X1: library part x0004, "=Описание", Contact_1=GND, Contact_2=GND, Contact_3=+12V, Contact_4=+12V, HelpURL=https://www.te.com/usa-en/product-4-1775099-0.html, ID=x0004, Наименование=4-1775099-0, Описание="ATX Power 4 pin гнездо прямой", Производитель="TE Connectivity", Фамилия=Ларионов
X2: library part x0003, "=Описание", Contact_1=+5V, Contact_2=NC, Contact_3=NC, Contact_4=GND, HelpURL=https://www.te.com/usa-en/product-292303-5.html, ID=x0003, Наименование=292303-5, Описание="USB 2.0 Type A гнездо", Производитель="TE Connectivity", Фамилия=Ларионов

## Free pads (board coordinates)
  round 3.3 hole 1.6: 2(60.3,57.8) 2(96.5,57.8) 2(96.5,94.2)

## Via types
v1: diameter 0.6, hole 0.3, Top Layer to Bottom Layer, tented both sides, 97 vias
v2: diameter 0.6, hole 0.3, Top Layer to Bottom Layer, tented top, 6 vias

## Nets (pads, with @x,y where several pads share a name; then routed paths per layer and width w, separated by ;. In a path a pad name is that pad's centre, name@x,y a point inside that pad or via, vN(x,y) a via of type N, cw(c..) or ccw(c..) an arc to the next point about the centre after c; other vN are vias at no path point)
+5V: C7.1 C8.1 L1.2 R6.2 R7.2 R9.2 VD4.2 | length 38.1
  Top Layer w0.25: VD4.2@80.1,83.8 VD4.2@80.4,83.5 ; L1.2@86.1,83.5 L1.2@86.1,83.663 ; L1.2 86.1,88.9 86.575,89.375 97.725,89.375 98.25,88.85 98.25,70.35 97.95,70.05 97.2,70.05 ; R7.2 97.2,70.05 ; R6.2 97.2,70.05
+12V: C1.2 C2.1 DD1.2 R1.2 R2.2 X1.3 X1.4
BOOT: C6.2 DD1.1 | length 3.3
  Top Layer w0.25: C6.2 89,71.625 89.025,71.6 89.055,71.6 DD1.1@89.105,71.6
COMP: C5.1 DD1.7 R5.2 | length 7.8
  Top Layer w0.25: DD1.7@92.845,69.2 v1(94,69.2) ; v1(94,67.4) 94,67.305 93.825,67.13 R5.2 93.825,64.9 93.875,64.85 95.475,64.85 C5.1
  Top Layer w0.381: C5.1@95.193,64.4 C5.1@95.425,64.4
  Bottom Layer w0.25: v1@93.933,69.133 v1(94,69.2) v1(94,67.4)
FB: DD1.6 R7.1 R8.2 | length 4.3
  Top Layer w0.25: DD1.6@92.895,68.4 R8.2 R7.1
GND: C1.1 C2.2 C3.2 C4.2 C5.2 C7.2 C8.2 DD1.0 DD1.8 HL1.1 pad.2 R3.1 R4.1 R8.1 VD3.2 VT1.S X2.4 X2.TP1 | length 1.9
  Top Layer w0.25: DD1.0@91,70 v2(91.5,70) DD1.8@92.895,70
  other v1: 63,57 66,57 84,57 87,57 90,57 93,57 61.5,60 64.5,60 70.5,60 82.5,60 85.5,60 88.5,60 91.5,60 94.5,60 97.5,60 60,63 63,63 69,63 72,63 84,63 87,63 90,63 93,63 70.5,66 76.5,66 82.5,66 85.5,66 88.5,66 91.5,66 94.5,66 97.5,66 60,69 63,69 66,69 75,69 70.5,72 73.5,72 76.5,72 79.5,72 82.5,72 85.5,72 91.5,72 60,75 63,75 66,75 69,75 72,75 75,75 84,75 96,75 61.5,78 64.5,78 67.5,78 73.5,78 76.5,78 60,81 63,81 66,81 69,81 75,81 93,81 96,81 61.5,84 64.5,84 67.5,84 70.5,84 76.5,84 82.5,84 94.5,84 97.5,84 60,87 63,87 66,87 69,87 72,87 75,87 93,87 96,87 61.5,90 64.5,90 67.5,90 82.5,90 85.5,90 60,93 63,93 66,93 75,93 78,93 81,93 84,93 87,93 90,93 93,93
  other v2: 90.375,69.025 91.525,69.025 90.35,70 90.325,70.875 91.5,70.875
NetC4_1: C4.1 R5.1 | length 1.3
  Top Layer w0.25: C4.1 R5.1
NetDD1_3: DD1.3 R2.1 R3.2 | length 5.5
  Top Layer w0.25: R3.2 85.375,67.625 85.375,68.9 85.675,69.2 85.7,69.2 86,69.5 87,69.5 87.5,70 DD1.3@89.055,70
NetDD1_10: DD1.10 R6.1 | length 6.2
  Top Layer w0.25: v1(92.7,72.7) 92.7,71.625 92.725,71.6 92.845,71.6 DD1.10@92.895,71.6 ; v1(96.2,71.7) R6.1
  Bottom Layer w0.25: v1(92.7,72.7) 93.7,71.7 v1(96.2,71.7)
NetHL1_2: HL1.2 R9.1 | length 1.6
  Top Layer w0.25: HL1.2 R9.1@78.7,77.425
NetR1_1: R1.1 VD1.1 VT1.G
NetVD1_2: VD1.2 VD2.2 | length 3.2
  Top Layer w0.381: VD2.2@70.5,61.8 VD2.2@71.159,61.141 ; VD1.2@72.91,61.141 VD1.2
  Top Layer w0.4: VD2.2@71.159,61.141 VD1.2@72.91,61.141
NetVD2_1: VD2.1 VT1.D X1.1 X1.2
NetVD4_1: VD4.1 X2.1 | length 6.4
  Top Layer w0.6: X2.1@73.28,89 X2.1 77.795,88.87 VD4.1
RT: DD1.5 R4.2 | length 2
  Top Layer w0.25: DD1.5@88.805,68.4 89.055,68.4 89.28,68.4 89.305,68.375 89.305,66.92 R4.2
SS: C3.1 DD1.4 | length 2.8
  Top Layer w0.25: C3.1 87.35,67.425 88.226,68.301 88.226,68.596 88.83,69.2 DD1.4@89.055,69.2
SW: C6.1 DD1.9 L1.1 VD3.1 | length 3.8
  Top Layer w0.25: C6.1 91.775,76.575 91.775,76.875 92.5,77.6
pads on no net: X2.2 X2.3

## Polygon pours and split planes (outlines as drawn)
+5V on Top Layer "+5V_L01_P042" (solid, pour order 42): 87.816,88.5 87.8,86.8 87.7,76 80.6,76 79.8,76.8 79.8,78.3 77.8,78.3 77,79.1 77,85 81.4,84.78 81.4,78.2 83.7,78.2 83.9,78.9 84.15,79.55 84.15,88.5
GND on Top Layer "GND_L01_P068" (solid, pour order 68): 56.7,97.7 57,98 100.4,98 100.4,53.5 100.5,53.4 56.2,53.4
+12V on Top Layer "+12V_L01_P066" (solid, pour order 66): 61.75,74.15 61.775,74.125 69.525,74.125 69.85,73.8 69.85,71.15 72.675,68.325 76.3,68.325 77.125,69.15 77.225,69.05 82.7,69.05 85.05,71.4 86.65,71.4 86.9,71.15 89.55,71.15 89.625,71.075 89.625,70.475 87.075,70.475 86.5,69.9 84.35,69.9 81.85,67.4 74.275,67.4 74.075,67.2 71.075,67.2 68.05,70.225 61.875,70.225
NetVD2_1 on Top Layer "NETVD2_1_L01_P064" (solid, pour order 64): 61.825,68.275 61.85,68.3 69.9,68.3 69.9,65.3 68.325,64.125 68.325,59.475 75.325,59.475 75.3,59.5 75.3,62.225 75.975,62.9 76,62.875 81.175,62.875 81.175,57.575 81.475,57.275 81.4,57.2 67.65,57.2 66.675,58.575 65.775,59.475 65.775,63.025 64.85,63.025 61.9,65.975
SW on Top Layer "SW_L01_P034" (solid, pour order 34): 88.5,88.5 88.5,80.3 88.5,77.3 90.65,75.25 93.8,72 94.1,71.5 94,71.3 93.8,71.1 92.3,71.1 92.3,70.5 94.3,70.5 94.8,71.1 94.8,71.8 93.6,74.4 93.6,76.8 93.4,79.2 93.1,79.7 92.3,80.74 92.3,88.5
NetR1_1 on Top Layer "NETR1_1_L01_P024" (solid, pour order 24): 74,67.1 72.6,67.1 72.6,66.5 72.4,62.8 74.2,62.8 75.4,63.4 77.156,63.4 77.041,65.243 74,65.348
+12V on Top Layer "+12V_L01_P014" (solid, pour order 14): 68,69.5
GND on Bottom Layer "GND_L02_P070" (solid, pour order 70): 55.9,98.9 101.2,98.9 102.1,98 102.1,50.6 54.2,50.6 54,50.4

## Silkscreen, mask and mechanical layers (free items; w line width, h text height)
Top Overlay:
  text "12V-5V 2A" at 83.7,93.1 h3
  text "Buck" at 84.1,90.3 h3
  text "5V OUT" at 59.6,84.5 h2 r90
  text "PWR" at 77.4,73.4 h1.2 r90
  text "12V IN" at 59.8,70.25 h2 r90
  text "GND" at 59.7,65.475 h2 r90
  text ".designation" at 79.6,55.7 h2
Bottom Overlay:
  text ".pcb_dec_number" at 95.6,55.7 h2
Board:
  the board outline again, w0.1
Assembly Notes:
  text "'.title'" at 50,47.5 h2
  text "'.project'_'.pcb_dec_number'['.Pcb_File_Name_No_Path']" at 50,45 h2